# Altium PCB AOP6432.PcbDoc (part 1 of 3)
Units mm, origin at the board's own origin, x right, y up, seen from the top; angles counter-clockwise.
Board outline 64.05 x 39.02 mm, 4 copper layers (Top Layer, Layer 1, Layer 2, Bottom Layer), stack 1.52 mm thick; 112 components, 77 nets, 423 pads, 19 vias.
Unrouted connection lines stored in the file: 2.
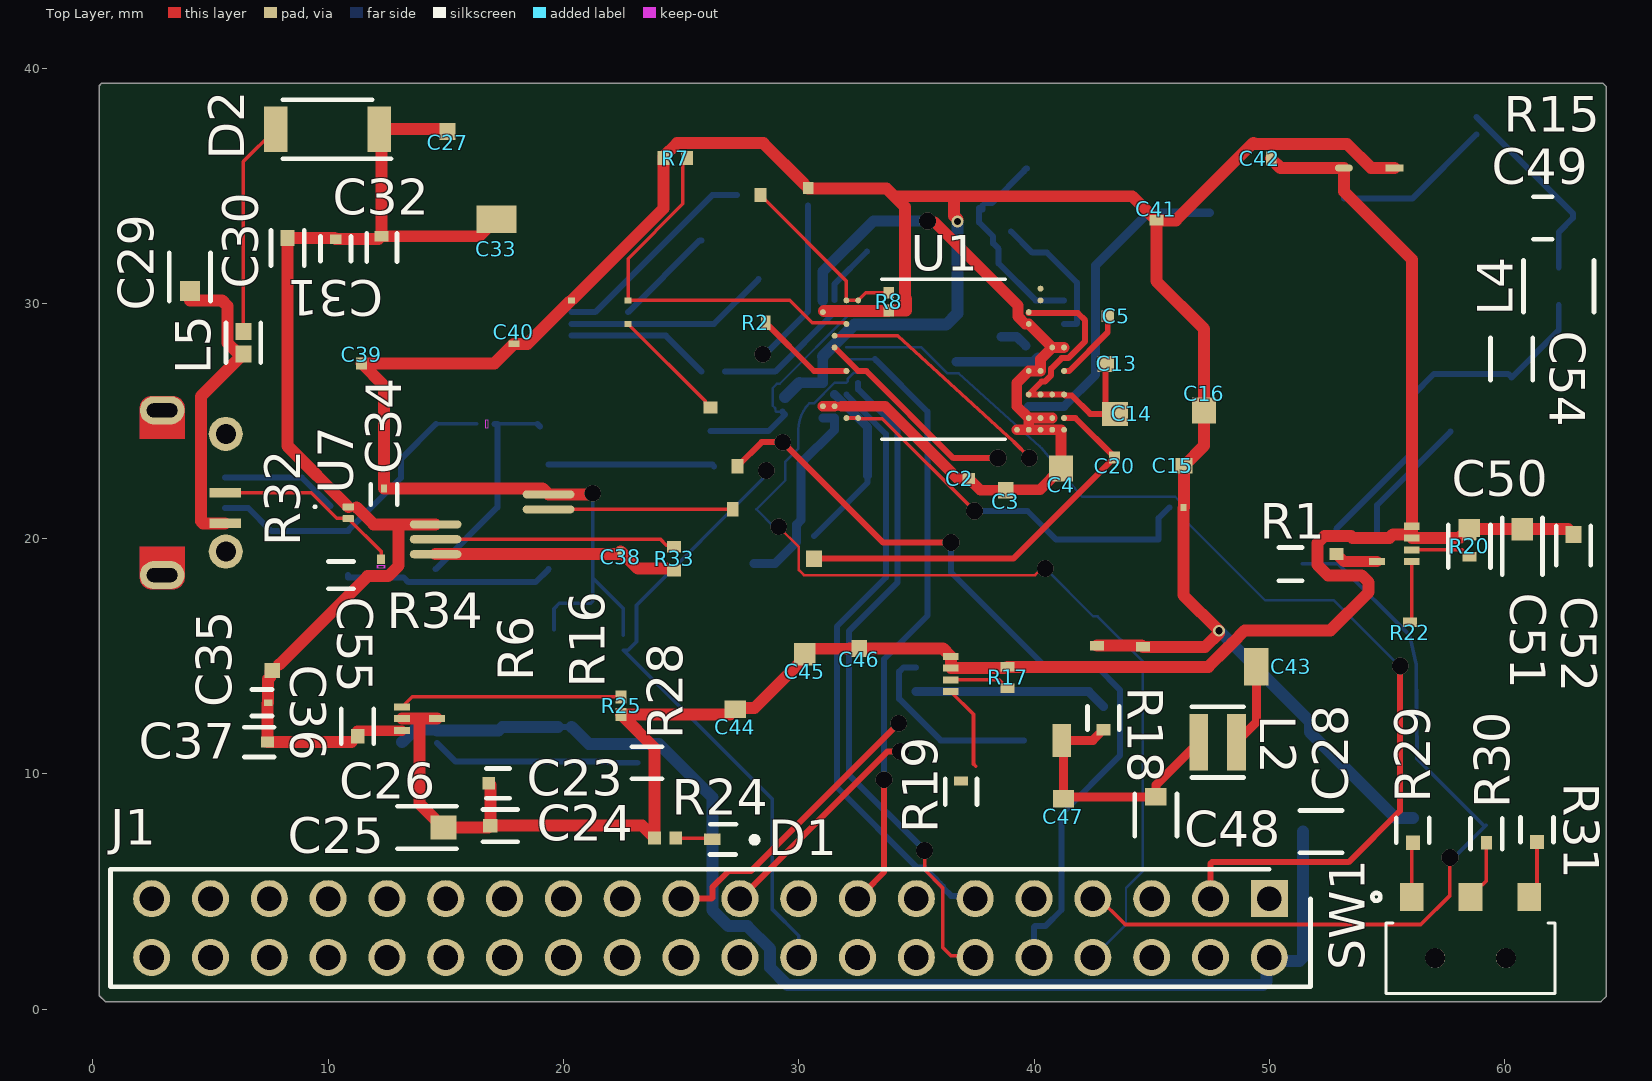
[diagram p0: Top Layer view]
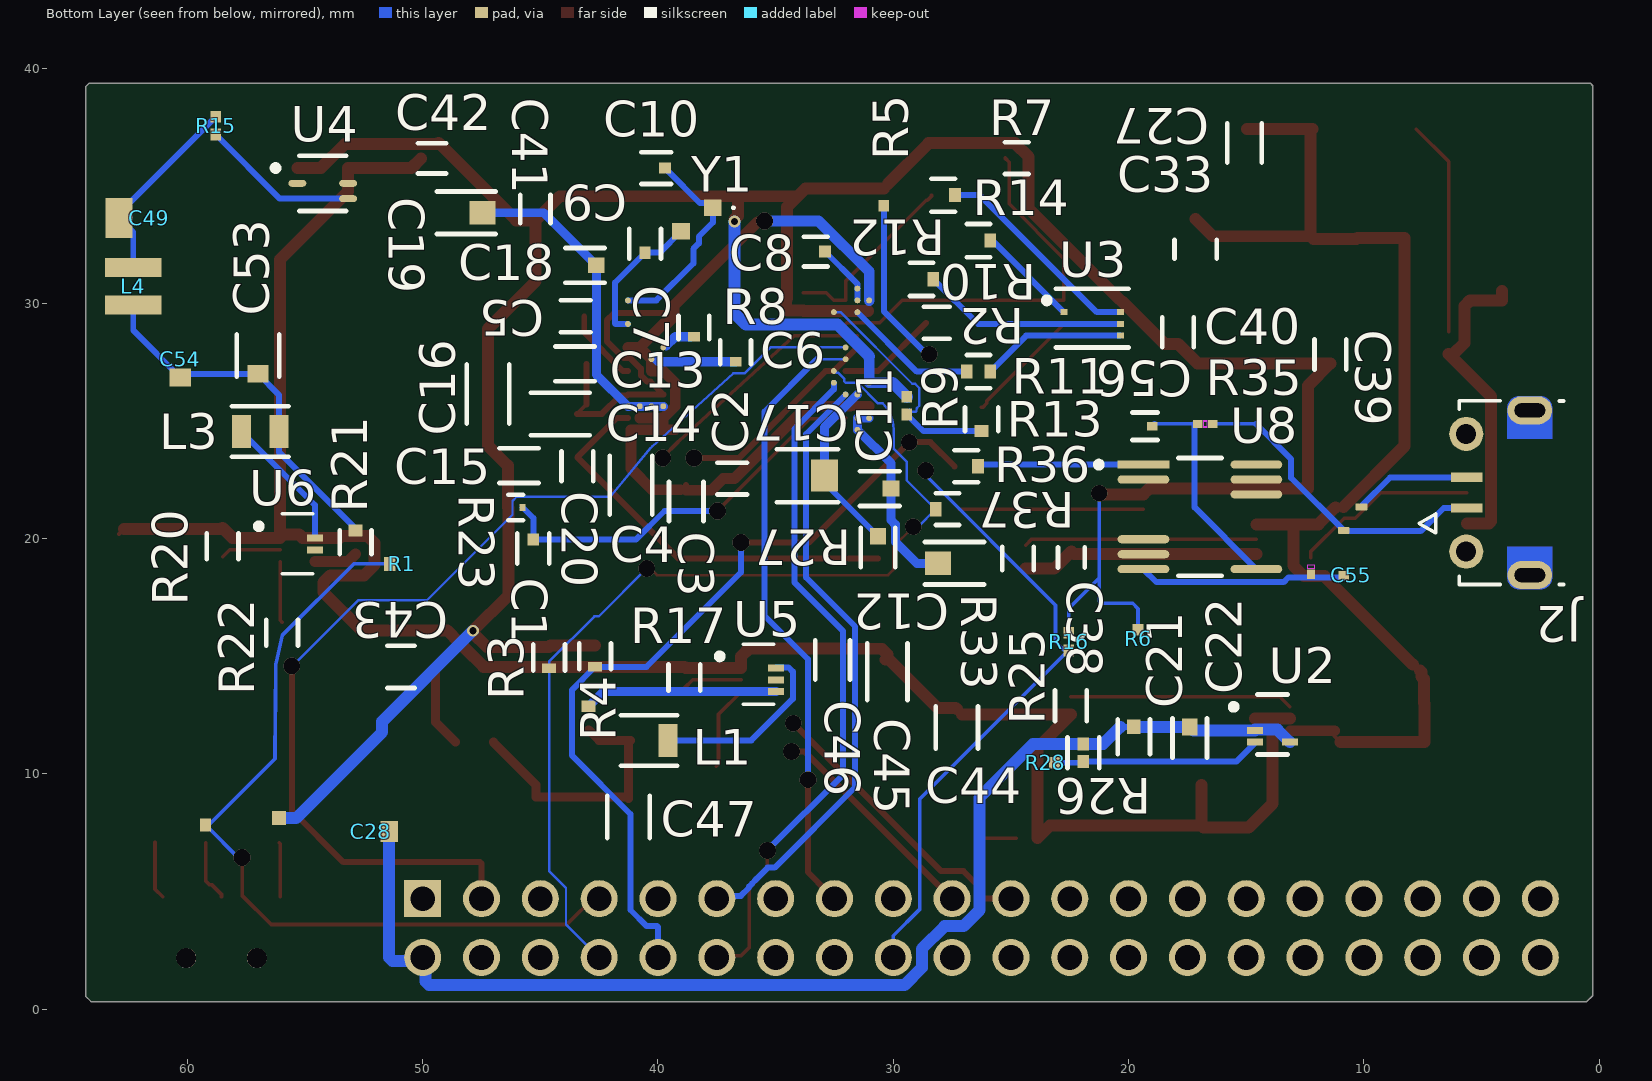
[diagram p1: Bottom Layer view, seen from below]
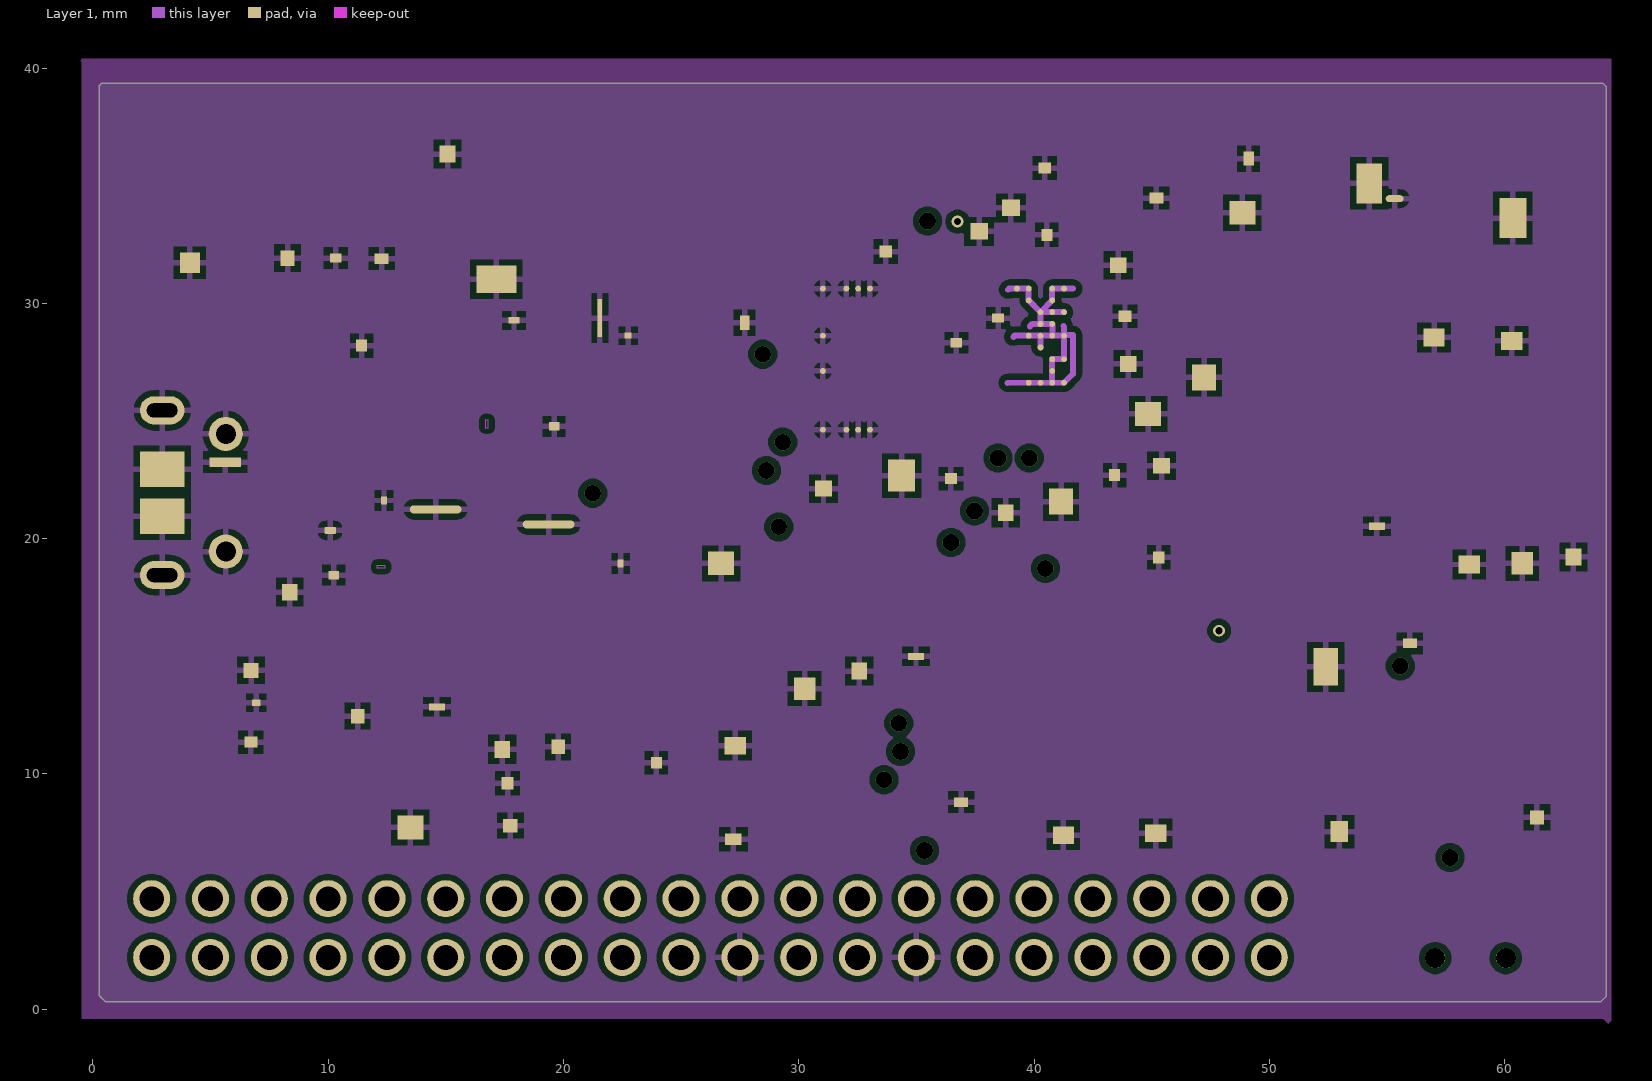
[diagram p2: Layer 1]
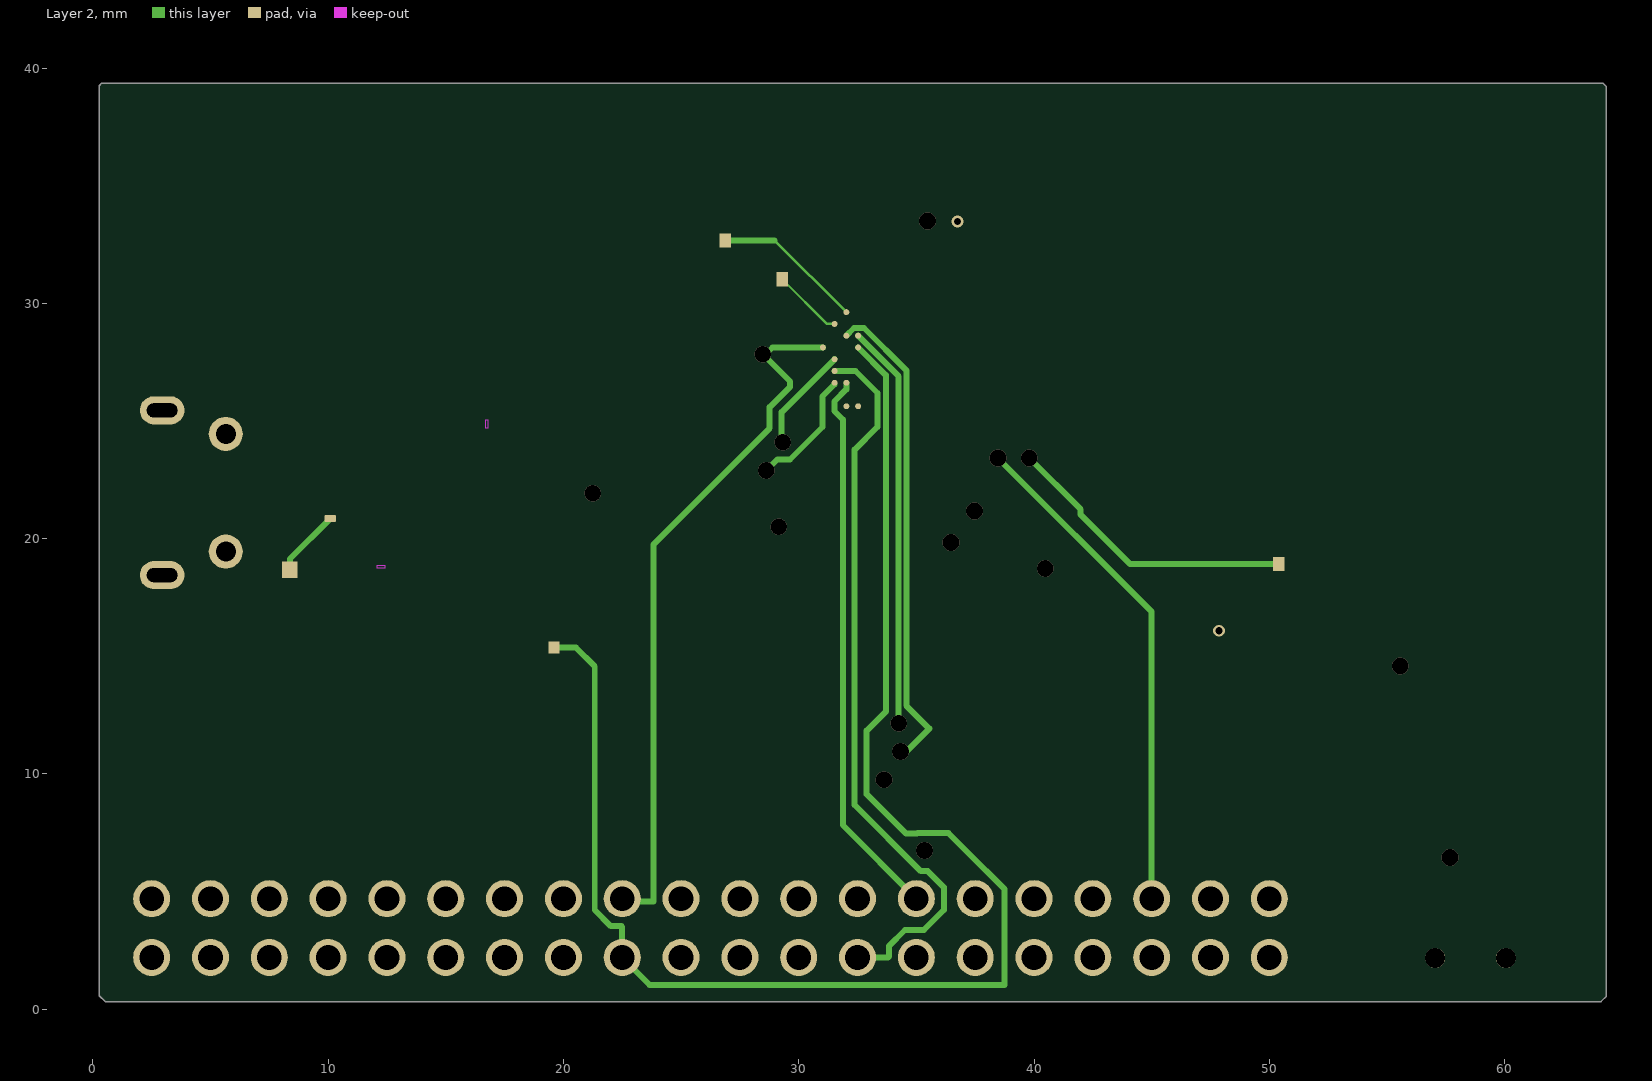
[diagram p3: Layer 2]
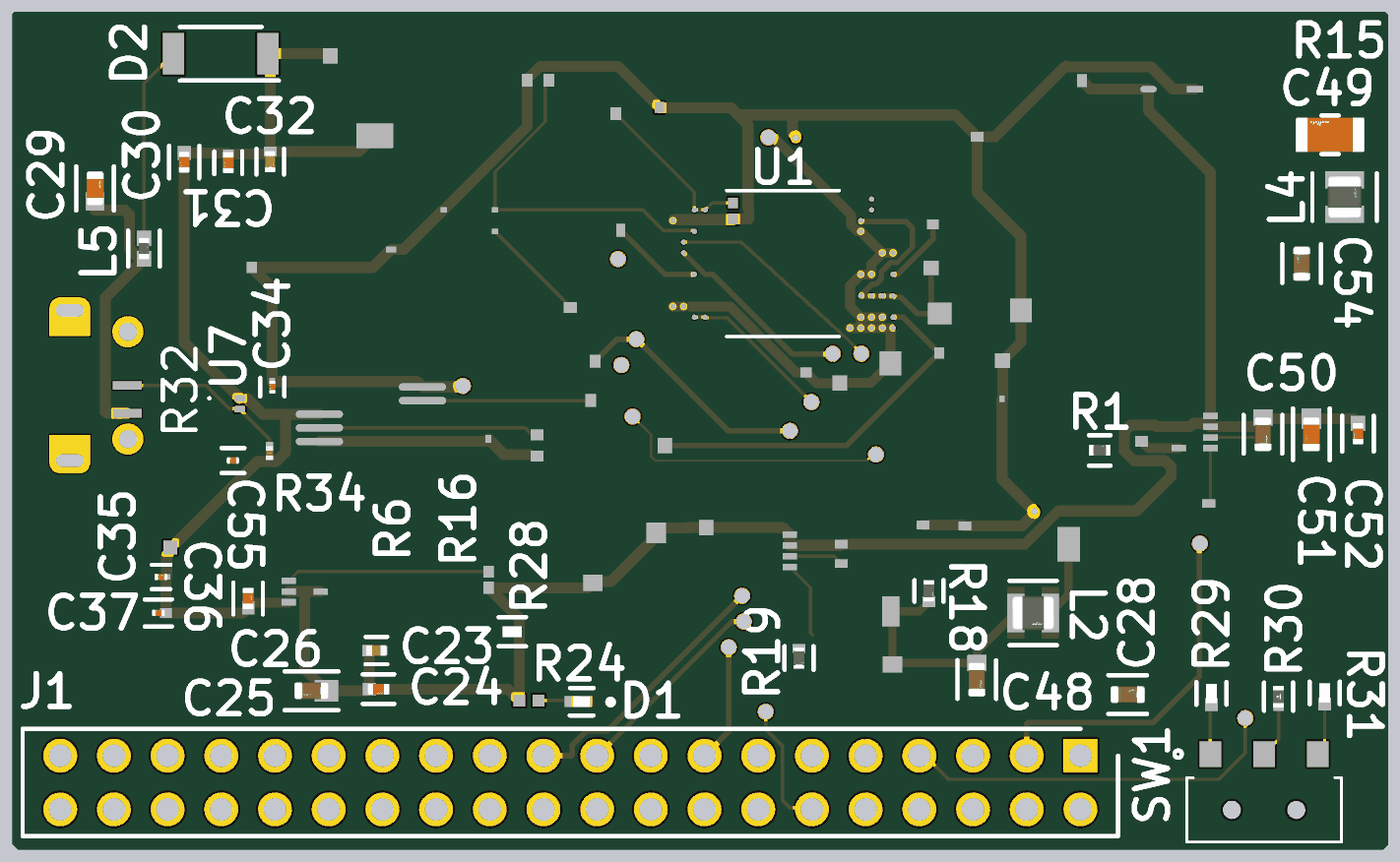
[diagram p5: 3D render of the assembled board from above, using the file's embedded part models]
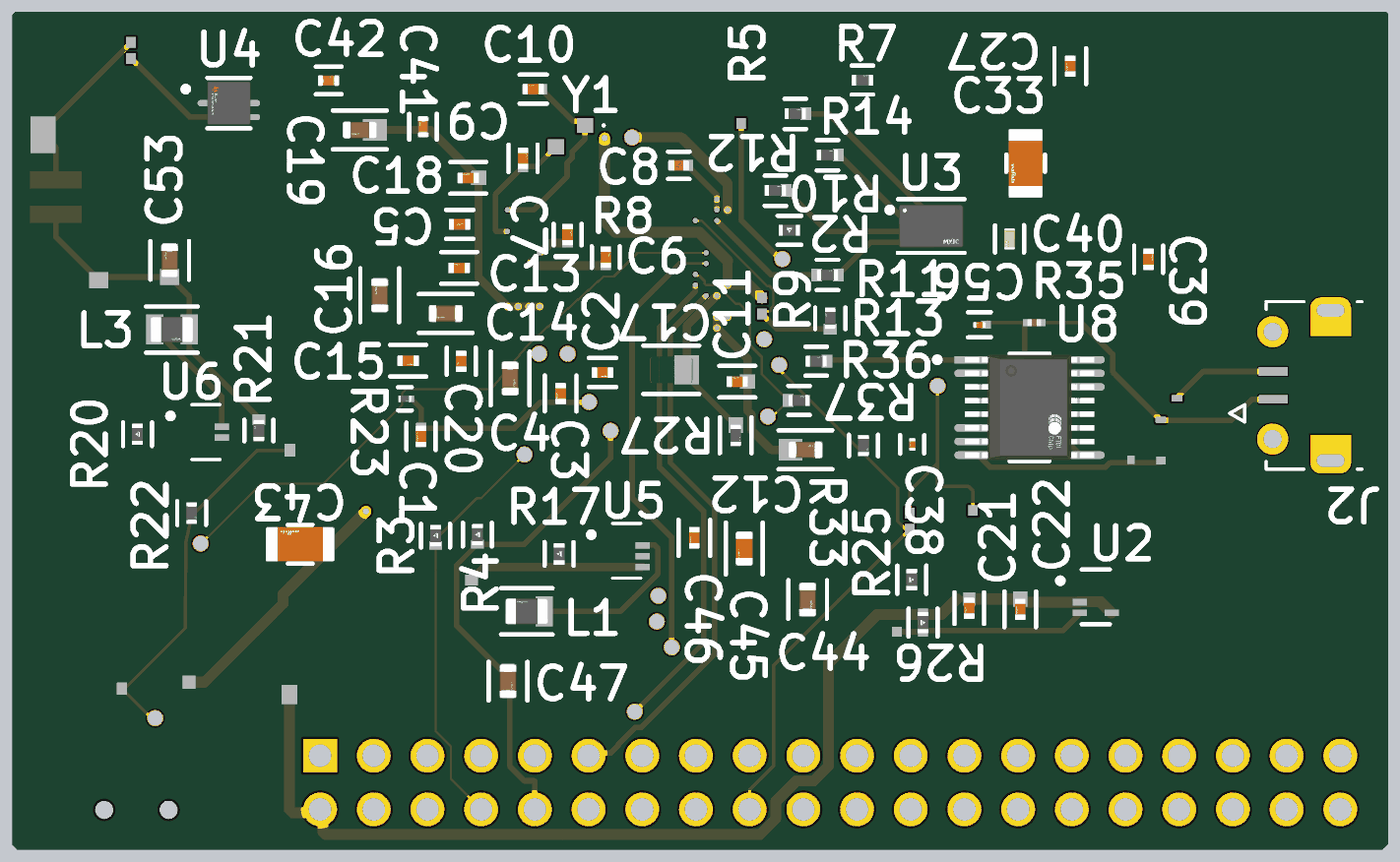
[diagram p6: 3D render of the assembled board from below, using the file's embedded part models]

## Layer stack, top to bottom
Top Solder: solder mask 0.0254, Solder Resist, Dk 3.5
Top Layer: signal copper 0.047
Dielectric 2: prepreg 0.1176, PP-006, Dk 4.1
Layer 1: signal copper 0.067
Dielectric 1: dielectric 1.0566, FR-4, Dk 4.8
Layer 2: signal copper 0.067
Dielectric 3: prepreg 0.1176, PP-006, Dk 4.1
Bottom Layer: signal copper 0.047
Bottom Solder: solder mask 0.0254, Solder Resist, Dk 3.5

## Board outline
0.275,0.575 0.275,39.25 0.375,39.35 64.175,39.35 64.325,39.2 64.325,0.55 64.1,0.325 0.525,0.325

## Design rules (kind name [scope] priority, off if disabled: settings)
Clearance [All] p1: gap=0.254 ignorepadtopadclearanceinfootprint=FALSE
PolygonConnect [All] p1: connectstyle=Relief reliefconductorwidth=0.254 reliefentries=4 polygonreliefangle="90 Angle" airgapwidth=0.254
RoutingVias [All] p1: holewidth=0.711 width=1.27 viastyle="Through Hole" minholewidth=0.711 minwidth=1.27 maxholewidth=0.711 maxwidth=1.27
SolderMaskExpansion [All] p1: expansion=0.102 istentingtop=FALSE
SupplyNets "Schematic Supply Nets_23" [InNet('FT230_VCC')] p1: voltage=0.000
SupplyNets "Schematic Supply Nets_22" [InNet('USB_VBUS')] p2: voltage=0.000
SupplyNets "Schematic Supply Nets_21" [InNet('RADAR_1V2')] p3: voltage=0.000
SupplyNets "Schematic Supply Nets_20" [InNet('FT230_VCCIO')] p4: voltage=0.000
SupplyNets "Schematic Supply Nets_13" [InNet('GND')] p5: voltage=0.000
SupplyNets "Schematic Supply Nets_18" [InNet('5V_REG')] p6: voltage=0.000
SupplyNets "Schematic Supply Nets_17" [InNet('TP10')] p7: voltage=0.000
SupplyNets "Schematic Supply Nets_16" [InNet('RADAR_1V_RF_OUT')] p8: voltage=0.000
SupplyNets "Schematic Supply Nets_15" [InNet('RADAR_1P2_RF')] p9: voltage=0.000
SupplyNets "Schematic Supply Nets_14" [InNet('REG_OUT_1V8')] p10: voltage=0.000
SupplyNets "Schematic Supply Nets_12" [InNet('RADAR_1V4_APLL')] p11: voltage=0.000
SupplyNets "Schematic Supply Nets_11" [InNet('RADAR_SRAM_1V2')] p12: voltage=0.000
SupplyNets "Schematic Supply Nets_10" [InNet('REG_1V2')] p13: voltage=0.000
SupplyNets "Schematic Supply Nets_8" [InNet('RADAR_1V8')] p14: voltage=0.000
SupplyNets "Schematic Supply Nets_7" [InNet('RADAR_1V4_SYNTH')] p15: voltage=0.000
SupplyNets "Schematic Supply Nets_6" [InNet('5V_IN')] p16: voltage=0.000
SupplyNets "Schematic Supply Nets_5" [InNet('REG_OUT_1V2')] p17: voltage=0.000
SupplyNets "Schematic Supply Nets_3" [InNet('REG_1V8')] p18: voltage=0.000
SupplyNets "Schematic Supply Nets_1" [InNet('RADAR_VBGAP')] p19: voltage=0.000
Width [All] p1: maxlimit=2.54 minlimit=0.102 preferedwidth=0.254 toplayer_maxwidth=0.508 toplayer_prefwidth=0.152 midlayer1_minwidth=0.102 midlayer1_prefwidth=0.152 midlayer2_minwidth=0.102 midlayer2_prefwidth=0.152 bottomlayer_maxwidth=0.508 minimp=50.000000 maximp=50.000000 favimp=50.000000
30 further rules are at their usual default settings.

## Classes and differential pairs
component class IO: C28 J1
component class IWRL6432AOP: C1 C8 C9 C10 C20 R1 R2 R3 R4 R5 R6 R16 R23 R27 U1 Y1
component class AOPIO: C29 C30 C31 C32 C33 C34 C35 C36 C37 C38 C55 C56 D2 J2 L5 R29 R30 R31 R32 R33 R34 R35 R36 R37 SW1 U7 U8
component class DC_Regulator: C21 C22 C23 C24 C25 C26 C27 C41 C42 C43 C44 C45 C46 C47 C48 C49 C50 C51 C52 C53 C54 D1 L1 L2 L3 L4 R15 R17 R18 R19 R20 R21 R22 R24 R25 R26 R28 U2 U4 U5 U6
component class AOP_Decoupling: C2 C3 C4 C5 C6 C7 C11 C12 C13 C14 C15 C16 C17 C18 C19 C39 C40 R7 R8 R9 R10 R11 R12 R13 R14 U3

## Components (designator, comment, footprint, x,y, rotation, side; value= is the part's Value field where it differs from the comment)
C1 "CL05B224KO5NNNC" FP-CL549-IPC_C 45.3,19.579 r270 bottom
C2 "GRM155R71C224KA12D" FP-GRM155-0_05-IPC_C 36.85,22.55 r180 bottom
C3 "GRM155R61A225ME01D" FP-GRM155-0_05-IPC_A#1 38.8,21.575 r270 bottom
C4 "GRM188Z71A106MA73D" FP-GRM188-0_2-IPC_B#1 41.15,22.274 r270 bottom
C5 "C1005X7R1H473K050BB" FP-C1005-050-0_05-IPC_C 43.5,29.45 r0 bottom
C6 "GRM155R70J105KA12D" FP-GRM155-0_05-MFG 36.7,27.925 r90 bottom
C7 "GRM155R70J105KA12D" FP-GRM155-0_05-MFG 38.475,28.975 r90 bottom
C8 "0.1uF" FP-C0402-BB-MFG 33.3,32.2 r0 bottom value="0.10 μF"
C9 "GJM1555C1H4R7BB01D" FP-GJM155-0_05-IPC_C 40.55,32.529 r90 bottom
C10 "GJM1555C1H4R7BB01D" FP-GJM155-0_05-IPC_C 40.075,35.75 r0 bottom
C11 "GRM155R61A225ME01D" FP-GRM155-0_05-IPC_A#2 30.575,22.125 r0 bottom
C12 "GRM188Z71A106MA73D" FP-GRM188-0_2-IPC_B#2 27.4,18.95 r180 bottom
C13 "GRM155R61A225ME01D" FP-GRM155-0_05-IPC_A#1 43.525,27.425 r0 bottom
C14 "GRM188Z71A106MA73D" FP-GRM188-0_2-IPC_B#1 44.15,25.3 r0 bottom
C15 "GRM155R61A225ME01D" FP-GRM155-0_05-IPC_A#1 45.9,23.1 r180 bottom
C16 "GRM188Z71A106MA73D" FP-GRM188-0_2-IPC_B#1 47.225,26.15 r90 bottom
C17 "GCJ21BR71C475KA01L" FP-GCJ21B-0_3-IPC_C 33.65,22.675 r0 bottom
C18 "GRM155R61A225ME01D" FP-GRM155-0_05-IPC_A#2 43.1,31.615 r0 bottom
C19 "GRM188Z71A106MA73D" FP-GRM188-0_2-IPC_B#2 48.15,33.85 r0 bottom
C20 "GRM155C80J105KA12D" FP-GRM155-0_05-IPC_C 43.425,23.075 r270 bottom
C21 "GRT155C81A105KE01D" FP-GRT155-0_05-IPC_B 19.775,11.575 r270 bottom
C22 "GCM155R71H104KE02D" FP-GCM155-0_05-IPC_A#1 17.4,11.521 r270 bottom
C23 "0.1uF" FP-C0402-BB-MFG 17.225,9.6 r0 top value="0.10 μF"
C24 "GRT155C81A105KE01D" FP-GRT155-0_05-IPC_B 17.321,7.8 r0 top
C25 "GRM188Z71A106MA73D" FP-GRM188-0_2-IPC_B#2 14.199,7.725 r180 top value=10uF
C26 "GRT155C81A105KE01D" FP-GRT155-0_05-IPC_B 11.25,12.025 r90 top
C27 "GCM155R71H104KE02D" FP-GCM155-0_05-IPC_A#2 15.075,36.821 r270 bottom
C28 "GRM188C81A106MA73D" FP-GRM188-0_2-MFG#1 52.2,7.55 r0 top
C29 "GRT188R61A106KE13D" FP-GRT188-0_15-IPC_C 4.125,31.125 r90 top
C30 "GCM155C71A474ME36J" FP-GCM155-0_1-IPC_B 8.275,32.35 r270 top
C31 "GCM155R71C224KE02D" FP-GCM155-0_05-MFG 10.325,32.325 r270 top
C32 "GRM155R61A106ME18D" FP-GRM155-0_2-MFG#1 12.275,32.375 r270 top
C33 "GRM31CR61A476ME15L" FP-GRM31C-0_2-e0_3_0_8-IPC_C 17.15,32.3 r270 bottom
C34 "GRM033R61C104ME14D" FP-GRM033-0_03-IPC_C#1 12.375,21.875 r270 top
C35 "0402ZD106MAT2A" CAPC1005X56N 7.175,14.4 r0 top
C36 "GRM033R61C104ME14D" FP-GRM033-0_03-IPC_C#1 7.2,13.025 r180 top
C37 "GRM033R70J103KA01D" FP-GRM033-0_03-IPC_A 7.071,11.35 r180 top
C38 "GRM033R61C104ME14D" FP-GRM033-0_03-IPC_C#2 22.432,19.2 r270 bottom
C39 "GRM155C80J105KA12D" FP-GRM155-0_05-IPC_C 11.425,27.825 r90 bottom
C40 "C1005X7R1H104K050BE" FP-C1005-050-IPC_C 17.9,28.775 r90 bottom
C41 "GRM155C81C225KE11D" FP-GRM155-0_2-MFG#2 45.2,34 r90 bottom
C42 "GRM155C81C225KE11D" FP-GRM155-0_2-MFG#2 49.6,36.15 r180 bottom
C43 "GRM31CR70J226ME19K" FP-GRM31C-0_2-e0_3_0_8-MFG 50.925,14.55 r0 bottom
C44 "GRM188C81A106MA73D" FP-GRM188-0_2-MFG#1 27.3,11.975 r270 bottom
C45 "GRM188R71C474KA88D" FP-GRM188-0_1-e0_2_0_5-IPC_B#1 30.25,14.352 r270 bottom
C46 "GRM1555C1H471JA01D" FP-GRM155-0_05-IPC_A#1 32.575,14.85 r270 bottom
C47 "GRM188C81A106MA73D" FP-GRM188-0_2-MFG#1 41.25,8.175 r270 bottom
C48 "GRM188C81A106MA73D" FP-GRM188-0_2-MFG#2 45.175,8.25 r270 top
C49 "GRM31CR60J476ME19L" FP-GRM31C-0_2-e0_3_0_8-IPC_C 61.625,33.625 r180 top
C50 "GRM188C81A106MA73D" FP-GRM188-0_2-MFG#2 58.5,19.675 r270 top
C51 "GRM188R71C474KA88D" FP-GRM188-0_1-e0_2_0_5-IPC_B#2 60.75,19.675 r270 top
C52 "GRM1555C1H471JA01D" FP-GRM155-0_05-IPC_A#2 62.925,19.7 r270 top
C53 "GRM188C81A106MA73D" FP-GRM188-0_2-MFG#2 57,27.775 r90 bottom
C54 "GRM188C81A106MA73D" FP-GRM188-0_2-MFG#1 60.3,27.625 r90 top
C55 "GCM0335C1E220JA16D" FP-GCM033-0_03-IPC_B#1 10.546,18.45 r180 top
C56 "GCM0335C1E220JA16D" FP-GCM033-0_03-IPC_B#2 19.3,24.775 r0 bottom
D1 "APHHS1005CGCK" FP-APHHS1005CGCK-MFG 26.775,7.225 r180 top
D2 "PMEG3020EP_115" SODFL4725X110N 9.975,37.4 r180 top
J1 "2714" 2714 2.883,1.398 r180 top
J2 "1050170001" MOLEX_1050170001 1.5,21.95 r90 bottom
L1 "470nH" FP-DFE201210U-MFG#1 40.375,11.425 r0 bottom
L2 "100nH" FP-LQM2MPZ_JH-w2_4-MFG#1 47.8,11.35 r0 top
L3 "470nH" FP-DFE201210U-MFG#2 56.9,24.55 r180 bottom
L4 "100nH" FP-LQM2MPZ_JH-w2_4-MFG#2 62.3,30.725 r90 top
L5 "BLM15PD300SZ1D" FP-BLM15-0_05-d0_7-IPC_A 6.4,28.325 r90 top
R1 "RT0402FRE0733R2L" FP-RT0402-0_35-MFG#1 50.9,18.925 r0 top
R2 "CRCW0402100KFKEDC" FP-CRCW0402-C-e3-MFG#1 28.15,29.175 r180 bottom
R3 "CRCW0402100KFKEDC" FP-CRCW0402-C-e3-MFG#2 44.625,14.95 r270 bottom
R4 "CRCW0402100KFKEDC" FP-CRCW0402-C-e3-MFG#2 42.675,15 r270 bottom
R5 "10k" RESC1005X40X25LL05T10#1 30.4,34.525 r270 bottom
R6 "10k" RESC1005X40X25LL05T10#2 19.6,15.75 r270 top
R7 "RC0402FR-1047K5L" FP-RC0402-0_4-MFG#1 24.75,36.175 r180 bottom
R8 "10k" RESC1005X40X25LL05T10#3 33.825,30.075 r270 bottom
R9 "10k" RESC1005X40X25LL05T10#4 29.425,25.65 r90 bottom
R10 "RT0402FRE0733R2L" FP-RT0402-0_35-MFG#2 28.8,31.025 r180 bottom
R11 "RT0402FRE0733R2L" FP-RT0402-0_35-MFG#3 26.375,27.1 r180 bottom
R12 "RT0402FRE0733R2L" FP-RT0402-0_35-MFG#2 26.375,32.675 r180 bottom
R13 "RT0402FRE0733R2L" FP-RT0402-0_35-MFG#4 26.25,25.075 r90 bottom
R14 "RT0402FRE0733R2L" FP-RT0402-0_35-MFG#5 27.875,34.6 r180 bottom
R15 "10k" RESC1005X40X25LL05T10#3 58.8,37.55 r270 top
R16 "10k" RESC1005X40X25LL05T10#3 22.55,15.625 r270 top
R17 "CRCW0402100KFKEDC" FP-CRCW0402-C-e3-MFG#3 38.875,14.1 r270 bottom
R18 "RC0402JR-070RP" FP-RC0402-0_4-MFG#2 42.95,12.375 r270 top
R19 "CRCW040218K0FKEDC" FP-CRCW0402-e3-MFG#1 36.9,9.25 r270 top
R20 "CRCW0402100KFKEDC" FP-CRCW0402-C-e3-MFG#3 58.5,19.675 r270 bottom
R21 "RC0402JR-070RP" FP-RC0402-0_4-MFG#2 52.85,19.85 r90 bottom
R22 "CRCW040218K0FKEDC" FP-CRCW0402-e3-MFG#2 55.975,16 r270 bottom
R23 "ERJ-1RHD1002C" FP-ERJ1R-MFG 46.05,21.325 r0 bottom
R24 "ERJ-2GEJ511X" RESC1005X40X25NL05T05 24.325,7.275 r180 top value=510
R25 "CRCW040210K0FKEDC" FP-CRCW0402-C-e3-IPC_C#1 22.45,12.9 r90 bottom
R26 "CRCW040210K0FKEDC" FP-CRCW0402-C-e3-IPC_C#2 21.925,10.9 r90 bottom
R27 "RC0402FR-071KL" FP-RC0402-0_4-IPC_A 30.65,19.625 r270 bottom
R28 "CRCW0402100KFKED" FP-CRCW0402-e3-IPC_C 23.55,10.475 r180 top
R29 "CRCW04027K87FKED" FP-CRCW0402-e3-MFG#3 56.1,7.6 r90 top
R30 "CRCW040210K0FKEDC" FP-CRCW0402-C-e3-IPC_C#3 59.225,7.451 r270 top
R31 "CRCW040282K5FKED" FP-CRCW0402-e3-MFG#4 61.375,7.625 r270 top
R32 "CRCW040210K0FKEDHP" RESC1005X40X25ML05T10 8.375,18.2 r90 top
R33 "RC0402JR-070RP" FP-RC0402-0_4-MFG#1 24.7,19.15 r270 bottom
R34 "RC0201JR-0727RL" RES_RC0201_P6XP3_YAG#1 12.25,18.8 r270 top
R35 "RC0201JR-0727RL" RES_RC0201_P6XP3_YAG#2 16.75,24.875 r0 bottom
R36 "RC0402JR-070RP" FP-RC0402-0_4-MFG#2 26.9,23.075 r180 bottom
R37 "RC0402JR-070RP" FP-RC0402-0_4-MFG#3 27.7,21.25 r180 bottom
SW1 "AYZ0102AGRLC" SW_AYZ0102AGRLC 58.55,2.325 r0 top
U1 "XI6432BRQAAMY" AMY0101A-MFG 36.152,27.625 r0 top
U2 "PTPS2116DRLR" DRL0008A-MFG 13.885,12.1 r180 bottom
U3 "MX25R1635FZUIH0" FP-USON-8-2x3mm-MFG 21.55,29.375 r180 bottom
U4 "TLV75533PDRVR" FP-DRV0006A-IPC_A 54.247,35.1 r180 bottom
U5 "TPS6285020ADRLR" TPS6285020ADRLR 35.725,14.5 r180 bottom
U6 "TPS6285020MDRLR" TPS6285020MDRLR 54.299,20.537 r180 bottom
U7 "TPD4E004DRYR" DRY0006A 10.475,20.85 r0 top
U8 "FT230XS-R" FP-SSOP-16-MFG 16.969,20.925 r180 bottom
Y1 "XRCGB40M000F1S2GR0" XRCGB40M000F1S2GR0 38.275,33.55 r0 bottom

## Footprints (in the part's own frame and the unit in brackets; to place one, negate y for a bottom-side part, rotate by r counter-clockwise, add the part's x,y. Pads: shape width x height; smd on the part's side, far side on the other; paste and mask are expansions set on the pad)
2714 [mm]
  rect 1.575x1.575 / inner round 1.575 / far side rect 1.575x1.575 hole 1.05: 1(-47.117,-3.302)
  round 1.575 hole 1.05: 2(-47.117,-0.802) 3(-44.617,-3.302) 4(-44.617,-0.802) 5(-42.117,-3.302) 6(-42.117,-0.802) 7(-39.617,-3.302) 8(-39.617,-0.802) 9(-37.117,-3.302) 10(-37.117,-0.802) 11(-34.617,-3.302) 12(-34.617,-0.802) 13(-32.117,-3.302) 14(-32.117,-0.802) 15(-29.617,-3.302) 16(-29.617,-0.802) 17(-27.117,-3.302) 18(-27.117,-0.802) 19(-24.617,-3.302) 20(-24.617,-0.802) 21(-22.117,-3.302) 22(-22.117,-0.802) 23(-19.617,-3.302) 24(-19.617,-0.802) 25(-17.117,-3.302) 26(-17.117,-0.802) 27(-14.617,-3.302) 28(-14.617,-0.802) 29(-12.117,-3.302) 30(-12.117,-0.802) 31(-9.617,-3.302) 32(-9.617,-0.802) 33(-7.117,-3.302) 34(-7.117,-0.802) 35(-4.617,-3.302) 36(-4.617,-0.802) 37(-2.117,-3.302) 38(-2.117,-0.802) 39(0.383,-3.302) 40(0.383,-0.802)
  silkscreen extent -48.87,-4.55 2.13,0.45
AMY0101A-MFG [mm]
  round 0.25 on Mid1 paste+0 mask+0.051: A1(-5.125,3) A3(-4.125,3) A4(-3.625,3) A5(-3.125,3) A6(3.125,3) A7(3.625,3) A9(4.625,3) A10(5.125,3) B7(3.625,2.5) B9(4.625,2.5) C8(4.125,2) C9(4.625,2) C10(5.125,2) D8(4.125,1.5) D9(4.625,1.5) E1(-5.125,1) E7(3.625,1) E8(4.125,1) E9(4.625,1) E10(5.125,1) F8(4.125,0.5) G9(4.625,0) G10(5.125,0) H1(-5.125,-0.5) H9(4.625,-0.5) J7(3.625,-1) J8(4.125,-1) J9(4.625,-1) J10(5.125,-1) N1(-5.125,-3) N3(-4.125,-3) N4(-3.625,-3) N5(-3.125,-3)
  round 0.25 smd far side paste+0 mask+0.051: A2(-4.625,3) B1(-5.125,2.5) B2(-4.625,2.5) B10(5.125,2.5) C2(-4.625,2) C4(-3.625,2) D10(5.125,1.5) F3(-4.125,0.5) F7(3.625,0.5) G3(-4.125,0) G8(4.125,0) H4(-3.625,-0.5) J1(-5.125,-1) J4(-3.625,-1) K2(-4.625,-1.5) K3(-4.125,-1.5) L7(3.625,-2) L8(4.125,-2) L9(4.625,-2) L10(5.125,-2) M1(-5.125,-2.5) M2(-4.625,-2.5) N2(-4.625,-3)
  round 0.25 smd paste+0 mask+0.051: A8(4.125,3) B3(-4.125,2.5) B4(-3.625,2.5) B8(4.125,2.5) C1(-5.125,2) C7(3.625,2) D3(-4.125,1.5) D7(3.625,1.5) E2(-4.625,1) F2(-4.625,0.5) F9(4.625,0.5) F10(5.125,0.5) H3(-4.125,-0.5) H7(3.625,-0.5) H8(4.125,-0.5) H10(5.125,-0.5) K7(3.625,-1.5) K8(4.125,-1.5) K9(4.625,-1.5) K10(5.125,-1.5) L1(-5.125,-2) L2(-4.625,-2) M3(-4.125,-2.5) M4(-3.625,-2.5) M7(3.625,-2.5) M8(4.125,-2.5) M9(4.625,-2.5) M10(5.125,-2.5) N6(3.125,-3) N7(3.625,-3) N8(4.125,-3) N9(4.625,-3) N10(5.125,-3)
  round 0.25 on Mid2 paste+0 mask+0.051: C3(-4.125,2) D2(-4.625,1.5) E3(-4.125,1) E4(-3.625,1) F1(-5.125,0.5) F4(-3.625,0.5) G2(-4.625,0) H2(-4.625,-0.5) J2(-4.625,-1) J3(-4.125,-1) L3(-4.125,-2) L4(-3.625,-2)
  silkscreen extent -2.63,-3.4 2.63,3.4
CAPC1005X56N [mm]
  rect 0.65x0.64 on Mid1: 1(-0.45,0)
  rect 0.65x0.64 smd: 2(0.45,0)
DRL0008A-MFG [mm]
  rect 0.67x0.3 on Mid1 paste+0 mask+0: 1(-0.74,0.75)
  rect 0.67x0.3 smd far side paste+0 mask+0: 2(-0.74,0.25) 6(0.74,-0.25) 7(0.74,0.25) 8(0.74,0.75)
  rect 0.67x0.3 smd paste+0 mask+0: 3(-0.74,-0.25) 4(-0.74,-0.75) 5(0.74,-0.75)
  silkscreen extent -1.78,-1.28 0.65,1.27
DRY0006A [mm] "SON, 6-Leads, Body 1.45x1mm, Pitch 0.5mm"
  rrect33% 0.52x0.3 smd far side: 1(-0.37,0.5)
  rrect33% 0.49x0.3 on Mid2: 2(-0.385,0)
  rrect33% 0.49x0.3 on Mid1: 3(-0.385,-0.5)
  rrect33% 0.49x0.3 smd far side: 4(0.385,-0.5)
  rrect33% 0.49x0.3 smd: 5(0.385,0) 6(0.385,0.5)
  silkscreen extent -1.08,0.45 -0.98,0.55, body extent -0.5,-0.72 0.5,0.72, height 0.6
FP-APHHS1005CGCK-MFG [mm]
  rect 0.7x0.5 on Mid1 paste+0 mask+0: 1(-0.45,0)
  rect 0.7x0.5 smd paste+0 mask+0: 2(0.45,0)
  silkscreen extent -1.48,-0.63 0.55,0.65, body extent -0.9,-0.4 0.9,0.4, height 0.25
FP-BLM15-0_05-d0_7-IPC_A [mm]
  rect 0.715x0.672 smd paste+0 mask+0: 1(-0.479,0) 2(0.479,0)
  silkscreen extent -0.84,-0.74 0.84,0.74, body extent -1.04,-0.54 1.04,0.54, height 0.25
FP-C0402-BB-MFG [mm]
  rect 0.52x0.52 smd paste+0 mask+0: 1(-0.4,0)
  rect 0.52x0.52 on Mid1 paste+0 mask+0: 2(0.4,0)
  silkscreen extent -0.5,-0.64 0.5,0.63, body extent -0.5,-0.25 0.5,0.25, height 0.55
FP-C1005-050-0_05-IPC_C [mm]
  rect 0.539x0.472 smd far side paste+0 mask+0: 1(-0.367,0)
  rect 0.539x0.472 on Mid1 paste+0 mask+0: 2(0.367,0)
  silkscreen extent -0.64,-0.67 0.64,0.67, body extent -0.5,-0.25 0.5,0.25, height 0.55
FP-C1005-050-IPC_C [mm]
  rect 0.272x0.472 smd far side paste+0 mask+0: 1(-0.5,0)
  rect 0.272x0.472 on Mid1 paste+0 mask+0: 2(0.5,0)
  silkscreen extent -0.64,-0.67 0.64,0.67, body extent -0.5,-0.25 0.5,0.25, height 0.55
FP-CL549-IPC_C [mm]
  rect 0.515x0.472 smd paste+0 mask+0: 1(-0.379,0)
  rect 0.515x0.472 on Mid1 paste+0 mask+0: 2(0.379,0)
  silkscreen extent -0.64,-0.67 0.64,0.67, body extent -0.5,-0.25 0.5,0.25, height 0.55
FP-CRCW0402-C-e3-IPC_C#1 [mm]
  rect 0.56x0.472 smd far side paste+0 mask+0: 1(-0.376,0) 2(0.376,0)
  silkscreen extent -0.66,-0.67 0.66,0.67, body extent -0.5,-0.25 0.5,0.25, height 0.35
FP-CRCW0402-C-e3-IPC_C#2 [mm]
  rect 0.56x0.472 smd paste+0 mask+0: 1(-0.376,0) 2(0.376,0)
  silkscreen extent -0.66,-0.67 0.66,0.67, body extent -0.5,-0.25 0.5,0.25, height 0.35
FP-CRCW0402-C-e3-IPC_C#3 [mm]
  rect 0.56x0.472 smd far side paste+0 mask+0: 1(-0.376,0)
  rect 0.56x0.472 smd paste+0 mask+0: 2(0.376,0)
  silkscreen extent -0.66,-0.67 0.66,0.67, body extent -0.76,-0.38 0.76,0.38, height 0.25
FP-CRCW0402-C-e3-MFG#1 [mm]
  rect 0.4x0.6 smd far side paste+0 mask+0: 1(-0.45,0)
  rect 0.4x0.6 on Mid1 paste+0 mask+0: 2(0.45,0)
  silkscreen extent -0.55,-0.67 0.55,0.67, body extent -0.5,-0.25 0.5,0.25, height 0.35
FP-CRCW0402-C-e3-MFG#2 [mm]
  rect 0.4x0.6 smd far side paste+0 mask+0: 1(-0.45,0)
  rect 0.4x0.6 smd paste+0 mask+0: 2(0.45,0)
  silkscreen extent -0.55,-0.67 0.55,0.67, body extent -0.5,-0.25 0.5,0.25, height 0.35
FP-CRCW0402-C-e3-MFG#3 [mm]
  rect 0.4x0.6 smd far side paste+0 mask+0: 1(-0.45,0) 2(0.45,0)
  silkscreen extent -0.55,-0.68 0.55,0.67, body extent -0.5,-0.25 0.5,0.25, height 0.35
FP-CRCW0402-e3-IPC_C [mm]
  rect 0.468x0.472 on Mid1 paste+0 mask+0: 1(-0.402,0)
  rect 0.468x0.472 smd far side paste+0 mask+0: 2(0.402,0)
  silkscreen extent -0.64,-0.67 0.64,0.67, body extent -0.74,-0.38 0.74,0.38, height 0.25
FP-CRCW0402-e3-MFG#1 [mm]
  rect 0.4x0.6 smd paste+0 mask+0: 1(-0.45,0)
  rect 0.4x0.6 on Mid1 paste+0 mask+0: 2(0.45,0)
  silkscreen extent -0.55,-0.67 0.55,0.67, body extent -0.75,-0.4 0.75,0.4, height 0.25
FP-CRCW0402-e3-MFG#2 [mm]
  rect 0.4x0.6 smd far side paste+0 mask+0: 1(-0.45,0)
  rect 0.4x0.6 on Mid1 paste+0 mask+0: 2(0.45,0)
  silkscreen extent -0.55,-0.67 0.55,0.68, body extent -0.5,-0.25 0.5,0.25, height 0.35
FP-CRCW0402-e3-MFG#3 [mm]
  rect 0.6x0.6 smd paste+0 mask+0: 1(-0.525,0)
  rect 0.6x0.6 smd far side paste+0 mask+0: 2(0.525,0)
  silkscreen extent -0.53,-0.7 0.53,0.7, body extent -0.92,-0.4 0.92,0.4, height 0.25
FP-CRCW0402-e3-MFG#4 [mm]
  rect 0.6x0.6 on Mid1 paste+0 mask+0: 1(-0.525,0)
  rect 0.6x0.6 smd paste+0 mask+0: 2(0.525,0)
  silkscreen extent -0.53,-0.7 0.53,0.7, body extent -0.92,-0.4 0.92,0.4, height 0.25
FP-DFE201210U-MFG#1 [mm]
  rect 0.8x1.4 smd paste+0 mask+0: 1(-0.8,0)
  rect 0.8x1.4 smd far side paste+0 mask+0: 2(0.8,0)
  silkscreen extent -1.2,-1.07 1.2,1.08, body extent -1,-0.6 1,0.6, height 1
FP-DFE201210U-MFG#2 [mm]
  rect 0.8x1.4 smd paste+0 mask+0: 1(-0.8,0) 2(0.8,0)
  silkscreen extent -1.2,-1.07 1.2,1.08, body extent -1,-0.6 1,0.6, height 1
FP-DRV0006A-IPC_A [mm]
  rect 0.756x0.292 smd far side paste+0 mask+0: 1(-1.078,0.65)
  rrect100% 0.756x0.292 smd paste+0 mask+0: 2(-1.078,0) 4(1.078,-0.65) 5(1.078,0)
  rrect100% 0.756x0.292 on Mid1 paste+0 mask+0: 3(-1.078,-0.65)
  rrect100% 0.756x0.292 smd far side paste+0 mask+0: 6(1.078,0.65)
  rect 1.1x1.7 on Mid1 paste-1000 mask+0: 7(0,0)
  silkscreen extent -2.13,-1.18 1,1.18, body extent -1,-1 1,1, height 0.8
FP-ERJ1R-MFG [mm]
  rect 0.25x0.3 smd paste+0 mask+0: 1(-0.3,0)
  rect 0.25x0.3 smd far side paste+0 mask+0: 2(0.3,0)
  silkscreen extent -0.32,-0.54 0.32,0.54, body extent -0.3,-0.15 0.3,0.15, height 0.26
FP-GCJ21B-0_3-IPC_C [mm]
  rect 1.153x1.356 smd paste+0 mask+0: 1(-0.725,0)
  rect 1.153x1.356 on Mid1 paste+0 mask+0: 2(0.725,0)
  silkscreen extent -1.3,-1.12 1.3,1.12, body extent -1,-0.63 1,0.63, height 1.45
FP-GCM033-0_03-IPC_B#1 [mm]
  rect 0.454x0.363 smd far side paste+0 mask+0: 1(-0.304,0)
  rect 0.454x0.363 on Mid1 paste+0 mask+0: 2(0.304,0)
  silkscreen extent -0.53,-0.58 0.53,0.58, body extent -0.68,-0.33 0.68,0.33, height 0.25
FP-GCM033-0_03-IPC_B#2 [mm]
  rect 0.454x0.363 smd paste+0 mask+0: 1(-0.304,0)
  rect 0.454x0.363 on Mid1 paste+0 mask+0: 2(0.304,0)
  silkscreen extent -0.53,-0.58 0.53,0.58, body extent -0.3,-0.15 0.3,0.15, height 0.33
FP-GCM155-0_1-IPC_B [mm]
  rect 0.66x0.612 smd paste+0 mask+0: 1(-0.426,0)
  rect 0.66x0.612 on Mid1 paste+0 mask+0: 2(0.426,0)
  silkscreen extent -0.76,-0.71 0.76,0.71, body extent -0.91,-0.46 0.91,0.46, height 0.25
FP-GCM155-0_05-IPC_A#1 [mm]
  rect 0.715x0.672 smd paste+0 mask+0: 1(-0.479,0)
  rect 0.715x0.672 on Mid1 paste+0 mask+0: 2(0.479,0)
  silkscreen extent -0.84,-0.74 0.84,0.74, body extent -0.5,-0.25 0.5,0.25, height 0.55
FP-GCM155-0_05-IPC_A#2 [mm]
  rect 0.715x0.672 smd far side paste+0 mask+0: 1(-0.479,0)
  rect 0.715x0.672 on Mid1 paste+0 mask+0: 2(0.479,0)
  silkscreen extent -0.84,-0.74 0.84,0.74, body extent -0.5,-0.25 0.5,0.25, height 0.55
FP-GCM155-0_05-MFG [mm]
  rect 0.4x0.5 smd paste+0 mask+0: 1(-0.4,0)
  rect 0.4x0.5 on Mid1 paste+0 mask+0: 2(0.4,0)
  silkscreen extent -0.53,-0.65 0.53,0.65, body extent -0.7,-0.38 0.7,0.38, height 0.25
FP-GJM155-0_05-IPC_C [mm]
  rect 0.515x0.472 smd paste+0 mask+0: 1(-0.379,0)
  rect 0.515x0.472 on Mid1 paste+0 mask+0: 2(0.379,0)
  silkscreen extent -0.64,-0.67 0.64,0.67, body extent -0.5,-0.25 0.5,0.25, height 0.55
FP-GRM31C-0_2-e0_3_0_8-IPC_C [mm]
  rect 1.155x1.706 smd far side paste+0 mask+0: 1(-1.276,0)
  rect 1.155x1.706 on Mid1 paste+0 mask+0: 2(1.276,0)
  silkscreen extent -0.4,-0.9 0.4,0.9, body extent -1.6,-0.8 1.6,0.8, height 1.8
FP-GRM31C-0_2-e0_3_0_8-MFG [mm]
  rect 1.05x1.6 smd far side paste+0 mask+0: 1(-1.475,0)
  rect 1.05x1.6 on Mid1 paste+0 mask+0: 2(1.475,0)
  silkscreen extent -0.57,-0.9 0.57,0.9, body extent -1.6,-0.8 1.6,0.8, height 1.8
FP-GRM033-0_03-IPC_A [mm]
  rect 0.554x0.463 smd paste+0 mask+0: 1(-0.354,0)
  rect 0.554x0.463 on Mid1 paste+0 mask+0: 2(0.354,0)
  silkscreen extent -0.63,-0.63 0.63,0.63, body extent -0.83,-0.43 0.83,0.43, height 0.25
FP-GRM033-0_03-IPC_C#1 [mm]
  rect 0.354x0.263 smd paste+0 mask+0: 1(-0.254,0)
  rect 0.354x0.263 on Mid1 paste+0 mask+0: 2(0.254,0)
  silkscreen extent -0.43,-0.57 0.43,0.57, body extent -0.53,-0.27 0.53,0.27, height 0.25
FP-GRM033-0_03-IPC_C#2 [mm]
  rect 0.354x0.263 smd far side paste+0 mask+0: 1(-0.254,0)
  rect 0.354x0.263 on Mid1 paste+0 mask+0: 2(0.254,0)
  silkscreen extent -0.43,-0.57 0.43,0.57, body extent -0.3,-0.15 0.3,0.15, height 0.33
FP-GRM155-0_2-MFG#1 [mm]
  rect 0.45x0.6 smd paste+0 mask+0: 1(-0.475,0)
  rect 0.45x0.6 on Mid1 paste+0 mask+0: 2(0.475,0)
  silkscreen extent -0.6,-0.64 0.6,0.65, body extent -0.5,-0.25 0.5,0.25, height 0.7
FP-GRM155-0_2-MFG#2 [mm]
  rect 0.45x0.6 smd far side paste+0 mask+0: 1(-0.475,0)
  rect 0.45x0.6 on Mid1 paste+0 mask+0: 2(0.475,0)
  silkscreen extent -0.6,-0.64 0.6,0.65, body extent -0.5,-0.25 0.5,0.25, height 0.7
FP-GRM155-0_05-IPC_A#1 [mm]
  rect 0.715x0.672 smd far side paste+0 mask+0: 1(-0.479,0)
  rect 0.715x0.672 on Mid1 paste+0 mask+0: 2(0.479,0)
  silkscreen extent -0.84,-0.74 0.84,0.74, body extent -0.5,-0.25 0.5,0.25, height 0.55
FP-GRM155-0_05-IPC_A#2 [mm]
  rect 0.715x0.672 smd paste+0 mask+0: 1(-0.479,0)
  rect 0.715x0.672 on Mid1 paste+0 mask+0: 2(0.479,0)
  silkscreen extent -0.84,-0.74 0.84,0.74, body extent -0.5,-0.25 0.5,0.25, height 0.55
FP-GRM155-0_05-IPC_C [mm]
  rect 0.515x0.472 smd far side paste+0 mask+0: 1(-0.379,0)
  rect 0.515x0.472 on Mid1 paste+0 mask+0: 2(0.379,0)
  silkscreen extent -0.64,-0.67 0.64,0.67, body extent -0.5,-0.25 0.5,0.25, height 0.55
FP-GRM155-0_05-MFG [mm]
  rect 0.4x0.5 smd paste+0 mask+0: 1(-0.4,0)
  rect 0.4x0.5 on Mid1 paste+0 mask+0: 2(0.4,0)
  silkscreen extent -0.5,-0.65 0.5,0.65, body extent -0.5,-0.25 0.5,0.25, height 0.55
FP-GRM188-0_1-e0_2_0_5-IPC_B#1 [mm]
  rect 0.959x0.912 smd far side paste+0 mask+0: 1(-0.727,0)
  rect 0.959x0.912 on Mid1 paste+0 mask+0: 2(0.727,0)
  silkscreen extent -1.21,-0.86 1.21,0.86, body extent -0.8,-0.4 0.8,0.4, height 0.9
FP-GRM188-0_1-e0_2_0_5-IPC_B#2 [mm]
  rect 0.959x0.912 smd paste+0 mask+0: 1(-0.727,0)
  rect 0.959x0.912 on Mid1 paste+0 mask+0: 2(0.727,0)
  silkscreen extent -1.21,-0.86 1.21,0.86, body extent -1.46,-0.71 1.46,0.71, height 0.25
FP-GRM188-0_2-IPC_B#1 [mm]
  rect 1.105x1.006 smd far side paste+0 mask+0: 1(-0.701,0)
  rect 1.105x1.006 on Mid1 paste+0 mask+0: 2(0.701,0)
  silkscreen extent -1.25,-0.9 1.25,0.9, body extent -0.8,-0.4 0.8,0.4, height 1
FP-GRM188-0_2-IPC_B#2 [mm]
  rect 1.105x1.006 smd paste+0 mask+0: 1(-0.701,0)
  rect 1.105x1.006 on Mid1 paste+0 mask+0: 2(0.701,0)
  silkscreen extent -1.25,-0.9 1.25,0.9, body extent -0.8,-0.4 0.8,0.4, height 1
FP-GRM188-0_2-MFG#1 [mm]
  rect 0.75x0.9 smd far side paste+0 mask+0: 1(-0.775,0)
  rect 0.75x0.9 on Mid1 paste+0 mask+0: 2(0.775,0)
  silkscreen extent -0.9,-0.9 0.9,0.9, body extent -1.25,-0.6 1.25,0.6, height 0.25
FP-GRM188-0_2-MFG#2 [mm]
  rect 0.75x0.9 smd paste+0 mask+0: 1(-0.775,0)
  rect 0.75x0.9 on Mid1 paste+0 mask+0: 2(0.775,0)
  silkscreen extent -0.9,-0.9 0.9,0.9, body extent -1.25,-0.6 1.25,0.6, height 0.25
FP-GRT155-0_05-IPC_B [mm]
  rect 0.615x0.572 smd paste+0 mask+0: 1(-0.429,0)
  rect 0.615x0.572 on Mid1 paste+0 mask+0: 2(0.429,0)
  silkscreen extent -0.74,-0.69 0.74,0.69, body extent -0.5,-0.25 0.5,0.25, height 0.55
FP-GRT188-0_15-IPC_C [mm]
  rect 0.856x0.858 smd paste+0 mask+0: 1(-0.601,0)
  rect 0.856x0.858 on Mid1 paste+0 mask+0: 2(0.601,0)
  silkscreen extent -1.03,-0.87 1.03,0.87, body extent -1.13,-0.58 1.13,0.58, height 0.25
FP-LQM2MPZ_JH-w2_4-MFG#1 [mm]
  rect 0.8x2.4 smd paste-1000 mask-1000: 1(-0.8,0) 2(0.8,0)
  silkscreen extent -1.1,-1.5 1.1,1.5, body extent -1.3,-1.3 1.3,1.3, height 0.25
FP-LQM2MPZ_JH-w2_4-MFG#2 [mm]
  rect 0.8x2.4 smd far side paste-1000 mask-1000: 1(-0.8,0) 2(0.8,0)
  silkscreen extent -1.1,-1.5 1.1,1.5, body extent -1.3,-1.3 1.3,1.3, height 0.25
FP-RC0402-0_4-IPC_A [mm]
  rect 0.715x0.672 smd paste+0 mask+0: 1(-0.479,0)
  rect 0.715x0.672 smd far side paste+0 mask+0: 2(0.479,0)
  silkscreen extent -0.84,-0.74 0.84,0.74, body extent -0.5,-0.25 0.5,0.25, height 0.4
FP-RC0402-0_4-MFG#1 [mm]
  rect 0.5x0.6 smd far side paste+0 mask+0: 1(-0.5,0) 2(0.5,0)
  silkscreen extent -0.5,-0.67 0.5,0.67, body extent -0.5,-0.25 0.5,0.25, height 0.4
FP-RC0402-0_4-MFG#2 [mm]
  rect 0.5x0.6 smd far side paste+0 mask+0: 1(-0.5,0)
  rect 0.5x0.6 smd paste+0 mask+0: 2(0.5,0)
  silkscreen extent -0.5,-0.68 0.5,0.67, body extent -0.85,-0.4 0.85,0.4, height 0.25
FP-RC0402-0_4-MFG#3 [mm]
  rect 0.5x0.6 smd paste+0 mask+0: 1(-0.5,0)
  rect 0.5x0.6 smd far side paste+0 mask+0: 2(0.5,0)
  silkscreen extent -0.5,-0.67 0.5,0.67, body extent -0.5,-0.25 0.5,0.25, height 0.4
FP-RT0402-0_35-MFG#1 [mm]
  rect 0.5x0.6 on Mid2 paste+0 mask+0: 1(-0.5,0)
  rect 0.5x0.6 smd far side paste+0 mask+0: 2(0.5,0)
  silkscreen extent -0.5,-0.71 0.5,0.7, body extent -0.85,-0.4 0.85,0.4, height 0.25
FP-RT0402-0_35-MFG#2 [mm]
  rect 0.5x0.6 on Mid2 paste+0 mask+0: 1(-0.5,0)
  rect 0.5x0.6 smd paste+0 mask+0: 2(0.5,0)
  silkscreen extent -0.5,-0.71 0.5,0.7, body extent -0.5,-0.25 0.5,0.25, height 0.35
FP-RT0402-0_35-MFG#3 [mm]
  rect 0.5x0.6 smd paste+0 mask+0: 1(-0.5,0) 2(0.5,0)
  silkscreen extent -0.5,-0.71 0.5,0.7, body extent -0.5,-0.25 0.5,0.25, height 0.35
FP-RT0402-0_35-MFG#4 [mm]
  rect 0.5x0.6 smd paste+0 mask+0: 1(-0.5,0)
  rect 0.5x0.6 smd far side paste+0 mask+0: 2(0.5,0)
  silkscreen extent -0.5,-0.71 0.5,0.7, body extent -0.5,-0.25 0.5,0.25, height 0.35
FP-RT0402-0_35-MFG#5 [mm]
  rect 0.5x0.6 smd far side paste+0 mask+0: 1(-0.5,0)
  rect 0.5x0.6 smd paste+0 mask+0: 2(0.5,0)
  silkscreen extent -0.5,-0.71 0.5,0.7, body extent -0.5,-0.25 0.5,0.25, height 0.35
FP-SSOP-16-MFG [mm]
  rect 2.2x0.345 smd paste+0 mask+0: 1(-2.4,2.223)
  rrect100% 2.2x0.345 smd paste+0 mask+0: 2(-2.4,1.588) 6(-2.4,-0.952) 7(-2.4,-1.587) 8(-2.4,-2.222) 9(2.4,-2.223) 14(2.4,0.952) 15(2.4,1.587) 16(2.4,2.222)
  rrect100% 2.2x0.345 smd far side paste+0 mask+0: 3(-2.4,0.953) 4(-2.4,0.318) 10(2.4,-1.588) 11(2.4,-0.953) 12(2.4,-0.318)
  rrect100% 2.2x0.345 on Mid1 paste+0 mask+0: 5(-2.4,-0.317) 13(2.4,0.317)
  silkscreen extent -4.42,-2.5 0.92,2.5, body extent -3.01,-2.45 3.01,2.45, height 1.75
FP-USON-8-2x3mm-MFG [mm]
  rect 0.3x0.25 smd far side paste+0 mask+0: 1(-1.2,0.75) 3(-1.2,-0.25) 8(1.2,0.75)
  rect 0.3x0.25 smd paste+0 mask+0: 2(-1.2,0.25) 5(1.2,-0.75) 6(1.2,-0.25) 7(1.2,0.25)
  rect 0.3x0.25 on Mid1 paste+0 mask+0: 4(-1.2,-0.75)
  rect 0.2x1.6 on Mid1 paste+0 mask+0: 9(0,0)
  silkscreen extent -2.05,-1.25 1.55,1.25, body extent -1.5,-1 1.5,1, height 0.6
MOLEX_1050170001 [mm]
  rect 0.4x1.35 smd far side mask+0.064: 1(-1.3,4.125) 3(0,4.125)
  rect 0.4x1.35 smd mask+0.064: 2(-0.65,4.125) 4(0.65,4.125)
  rect 0.4x1.35 on Mid1 mask+0.064: 5(1.3,4.125)
  round 1.45 hole 0.85 mask+0.064: SH1(-2.5,4.15) SH2(2.5,4.15)
  oval 1.2x1.9 hole 0.6 slot 1.3 at 90 deg mask+0: SH3(-3.5,1.45) SH6(3.5,1.45)
  rect 1.5x1.9 on Mid1 mask+0.064: SH4(-1,1.45) SH5(1,1.45)
  Top Layer region: 3.626,2.399 3.652,2.397 3.678,2.394 3.704,2.389 3.729,2.383 3.755,2.376 3.779,2.367 3.803,2.357 3.827,2.346 3.85,2.333 3.872,2.319 3.894,2.305 3.915,2.289 3.935,2.272 3.954,2.254 3.972,2.235 3.989,2.215 4.005,2.194 4.019,2.172 4.033,2.15 4.046,2.127 4.057,2.103 4.067,2.079 4.076,2.055 4.083,2.029 4.089,2.004 4.094,1.978 4.097,1.952 4.099,1.926 4.1,1.9 4.1,1 4.099,0.974 4.097,0.948 4.094,0.922 4.089,0.896 4.083,0.871 4.076,0.845 4.067,0.821 4.057,0.797 4.046,0.773 4.033,0.75 4.019,0.728 4.005,0.706 3.989,0.685 3.972,0.665 3.954,0.646 3.935,0.628 3.915,0.611 3.894,0.595 3.872,0.581 3.85,0.567 3.827,0.554 3.803,0.543 3.779,0.533 3.755,0.524 3.729,0.517 3.704,0.511 3.678,0.506 3.652,0.503 3.626,0.501 3.6,0.5 2.3,0.5 2.3,2.4 3.6,2.4
  Top Layer region: -2.3,0.5 -3.6,0.5 -3.626,0.501 -3.652,0.503 -3.678,0.506 -3.704,0.511 -3.729,0.517 -3.755,0.524 -3.779,0.533 -3.803,0.543 -3.827,0.554 -3.85,0.567 -3.872,0.581 -3.894,0.595 -3.915,0.611 -3.935,0.628 -3.954,0.646 -3.972,0.665 -3.989,0.685 -4.005,0.706 -4.019,0.728 -4.033,0.75 -4.046,0.773 -4.057,0.797 -4.067,0.821 -4.076,0.845 -4.083,0.871 -4.089,0.896 -4.094,0.922 -4.097,0.948 -4.099,0.974 -4.1,1 -4.1,1.9 -4.099,1.926 -4.097,1.952 -4.094,1.978 -4.089,2.004 -4.083,2.029 -4.076,2.055 -4.067,2.079 -4.057,2.103 -4.046,2.127 -4.033,2.15 -4.019,2.172 -4.005,2.194 -3.989,2.215 -3.972,2.235 -3.954,2.254 -3.935,2.272 -3.915,2.289 -3.894,2.305 -3.872,2.319 -3.85,2.333 -3.827,2.346 -3.803,2.357 -3.779,2.367 -3.755,2.376 -3.729,2.383 -3.704,2.389 -3.678,2.394 -3.652,2.397 -3.626,2.399 -3.6,2.4 -2.3,2.4
  Bottom Layer region: -2.3,0.5 -3.6,0.5 -3.626,0.501 -3.652,0.503 -3.678,0.506 -3.704,0.511 -3.729,0.517 -3.755,0.524 -3.779,0.533 -3.803,0.543 -3.827,0.554 -3.85,0.567 -3.872,0.581 -3.894,0.595 -3.915,0.611 -3.935,0.628 -3.954,0.646 -3.972,0.665 -3.989,0.685 -4.005,0.706 -4.019,0.728 -4.033,0.75 -4.046,0.773 -4.057,0.797 -4.067,0.821 -4.076,0.845 -4.083,0.871 -4.089,0.896 -4.094,0.922 -4.097,0.948 -4.099,0.974 -4.1,1 -4.1,1.9 -4.099,1.926 -4.097,1.952 -4.094,1.978 -4.089,2.004 -4.083,2.029 -4.076,2.055 -4.067,2.079 -4.057,2.103 -4.046,2.127 -4.033,2.15 -4.019,2.172 -4.005,2.194 -3.989,2.215 -3.972,2.235 -3.954,2.254 -3.935,2.272 -3.915,2.289 -3.894,2.305 -3.872,2.319 -3.85,2.333 -3.827,2.346 -3.803,2.357 -3.779,2.367 -3.755,2.376 -3.729,2.383 -3.704,2.389 -3.678,2.394 -3.652,2.397 -3.626,2.399 -3.6,2.4 -2.3,2.4
  Bottom Layer region: 3.626,2.399 3.652,2.397 3.678,2.394 3.704,2.389 3.729,2.383 3.755,2.376 3.779,2.367 3.803,2.357 3.827,2.346 3.85,2.333 3.872,2.319 3.894,2.305 3.915,2.289 3.935,2.272 3.954,2.254 3.972,2.235 3.989,2.215 4.005,2.194 4.019,2.172 4.033,2.15 4.046,2.127 4.057,2.103 4.067,2.079 4.076,2.055 4.083,2.029 4.089,2.004 4.094,1.978 4.097,1.952 4.099,1.926 4.1,1.9 4.1,1 4.099,0.974 4.097,0.948 4.094,0.922 4.089,0.896 4.083,0.871 4.076,0.845 4.067,0.821 4.057,0.797 4.046,0.773 4.033,0.75 4.019,0.728 4.005,0.706 3.989,0.685 3.972,0.665 3.954,0.646 3.935,0.628 3.915,0.611 3.894,0.595 3.872,0.581 3.85,0.567 3.827,0.554 3.803,0.543 3.779,0.533 3.755,0.524 3.729,0.517 3.704,0.511 3.678,0.506 3.652,0.503 3.626,0.501 3.6,0.5 2.3,0.5 2.3,2.4 3.6,2.4
  silkscreen extent -3.9,0 3.9,6.15
RES_RC0201_P6XP3_YAG#1 [mil]
  rect 16x13 smd paste+0 mask+0: 1(-12.5,0)
  rect 16x13 smd far side paste+0 mask+0: 2(12.5,0)
  Top Layer keep-out region: -2.5,-4.5 -2.5,4.5 2.5,4.5 2.5,-4.5
  Keep-Out Layer region: -2.5,-6.5 -2.5,6.5 2.5,6.5 2.5,-6.5
  body extent -13,-6 13,6, height 10
RES_RC0201_P6XP3_YAG#2 [mil]
  rect 16x13 smd paste+0 mask+0: 1(-12.5,0) 2(12.5,0)
  Top Layer keep-out region: -2.5,-4.5 -2.5,4.5 2.5,4.5 2.5,-4.5
  Keep-Out Layer region: -2.5,-6.5 -2.5,6.5 2.5,6.5 2.5,-6.5
  body extent -13,-6 13,6, height 10
RESC1005X40X25LL05T10#1 [mm] "Chip Resistor, 2-Leads, Body 1.00x0.50mm, IPC High Density"
  rect 0.5x0.45 smd far side: 1(-0.375,0)
  rect 0.5x0.45 smd: 2(0.375,0)
  body extent -0.53,-0.27 0.53,0.28, height 0.4
RESC1005X40X25LL05T10#2 [mm] "Chip Resistor, 2-Leads, Body 1.00x0.50mm, IPC High Density"
  rect 0.5x0.45 smd far side: 1(-0.375,0)
  rect 0.5x0.45 on Mid2: 2(0.375,0)
  body extent -0.53,-0.27 0.53,0.28, height 0.4
RESC1005X40X25LL05T10#3 [mm] "Chip Resistor, 2-Leads, Body 1.00x0.50mm, IPC High Density"
  rect 0.5x0.45 smd far side: 1(-0.375,0) 2(0.375,0)
  body extent -0.53,-0.27 0.53,0.28, height 0.4
RESC1005X40X25LL05T10#4 [mm] "Chip Resistor, 2-Leads, Body 1.00x0.50mm, IPC High Density"
  rect 0.5x0.45 smd: 1(-0.375,0) 2(0.375,0)
  body extent -0.53,-0.27 0.53,0.28, height 0.4
RESC1005X40X25ML05T10 [mm] "Chip Resistor, 2-Leads, Body 1.00x0.50mm, IPC Low Density"
  rect 0.7x0.65 on Mid1: 1(-0.475,0)
  rect 0.7x0.65 on Mid2: 2(0.475,0)
  body extent -0.53,-0.27 0.53,0.28, height 0.4
RESC1005X40X25NL05T05 [mm] "Chip Resistor, 2-Leads, Body 1.00x0.50mm, IPC Medium Density"
  rect 0.55x0.55 smd: 1(-0.45,0) 2(0.45,0)
  body extent -0.53,-0.27 0.53,0.28, height 0.4
SODFL4725X110N [mm]
  rect 1x1.93 smd: 1(-2.2,0) 2(2.2,0)
  silkscreen extent -2.7,-1.25 1.9,1.25
SW_AYZ0102AGRLC [mm]
  rect 1x1.2 smd: 1(-2.5,2.45) 2(0,2.45) 3(2.5,2.45)
  round 0.85 hole 0.85 unplated: ""(-1.5,-0.15) ""(1.5,-0.15)
  silkscreen extent -4.17,-1.65 3.6,2.62
TPS6285020ADRLR [mm]
  rect 0.67x0.3 smd far side paste+0 mask+0: 1(-0.74,0.496) 2(-0.74,-0.004) 3(-0.74,-0.504) 4(-0.74,-1.004)
  rect 0.67x0.3 smd paste+0 mask+0: 5(0.74,-1.004) 6(0.74,-0.504) 7(0.74,-0.004)
  rect 0.67x0.3 on Mid1 paste+0 mask+0: 8(0.74,0.496)
  silkscreen extent -1.78,-1.53 0.65,1.02
TPS6285020MDRLR [mm]
  rect 0.67x0.3 smd far side paste+0 mask+0: 1(-1.756,-0.012) 2(-1.756,-0.512) 3(-1.756,-1.012) 4(-1.756,-1.512) 5(-0.276,-1.512)
  rect 0.67x0.3 smd paste+0 mask+0: 6(-0.276,-1.012) 7(-0.276,-0.512)
  rect 0.67x0.3 on Mid1 paste+0 mask+0: 8(-0.276,-0.012)
  silkscreen extent -2.79,-2.04 -0.37,0.51
XRCGB40M000F1S2GR0 [mm]
  rect 0.75x0.7 smd: 1(-0.605,-0.51) 3(0.745,0.49)
  rect 0.75x0.7 on Mid1: 2(0.745,-0.51) 4(-0.605,0.49)
  silkscreen extent -1.53,-0.56 -1.43,-0.46

## Part data
C1: library part CMP-13271-002972-1, "Cap Ceramic 220nF 16V X7R ±10% SMD 0402 +125°C Paper T/R", Capacitance=220nF, Case Code (Imperial)=0402, Case Code (Metric)=1005, Dielectric=X7R, Max Operating Temperature=125°C, Min Operating Temperature=-55°C, Package Quantity=1, Tolerance=10%, Voltage Rating=16V, Case/Package=0402, Depth=0.5mm, Height=0.5mm, Length=1mm, Mount="Surface Mount", Packaging="Tape and Reel", Radiation Hardening=No, Thickness=0.022inch, Width=0.02inch
C2: library part CMP-1034-02089-3, "Chip Multilayer Ceramic Capacitors for General Purpose, 0402, 0.22uF, X7R, 15%, 10%, 16V", Capacitance=220nF, Case Code (Imperial)=0402, Case Code (Metric)=1005, Dielectric=X7R, Max Operating Temperature=125°C, Min Operating Temperature=-55°C, Package Quantity=1, Tolerance=10%, Voltage=16V, Case/Package=0402, Depth=0.5mm, Height=0.5mm, Lead Free="Lead Free", Length=1mm, Material=Ceramic, Mount="Surface Mount", Packaging="Tape and Reel", Radiation Hardening=No, REACH SVHC="No SVHC", Termination=SMD/SMT, Thickness=0.022inch, Voltage Rating=16V, Voltage Rating (DC)=16V, Width=0.02inch
C3 C11 C13 C15 C18: library part CMP-06035-017182-1, "Chip Multilayer Ceramic Capacitors for General Purpose, 0402, 2.2uF, X5R, 15%, 20%, 10V", Capacitance=2.2uF, Voltage=10V
C4 C12 C14 C16 C19: library part CMP-06035-036920-1, "Chip Multilayer Ceramic Capacitors for General Purpose, 0603, 10uF, X7R, 15%, 20%, 10V", Capacitance=10uF, Case/Package=0603, Voltage=10V
C5: library part CMP-2000-06006-2, "Multilayer Ceramic Capacitors 47nF ±10% 50V X7R SMD 0402", Capacitance=47nF, Case Code (Imperial)=0402, Case Code (Metric)=1005, Dielectric=X7R, Dielectric Material=Ceramic, Max Operating Temperature=125°C, Min Operating Temperature=-55°C, Package Quantity=1, Tolerance=10%, Voltage=50V, Case/Package=0402, Construction=Flat, Depth=0.5mm, Dissipation Factor=5%, Height=0.5mm, Lead Free="Lead Free", Length=1mm, Mount="Surface Mount", Number of Pins=2, Packaging="Tape and Reel", Radiation Hardening=No, REACH SVHC="No SVHC", Resistor Type=Ceramic, RoHS Compliant=Yes, Series=C, Termination=SMD/SMT, Thickness=0.022inch, Voltage Rating=50V, Voltage Rating (DC)=50V, Weight=2.3E-05oz, Width=0.02inch
C6 C7: library part CMP-2008-04587-2, "Chip Multilayer Ceramic Capacitors for General Purpose, 0402, 1.0uF, X7R, 15%, 10%, 6.3V", Capacitance=1uF, Case Code (Imperial)=0402, Case Code (Metric)=1005, Dielectric=X7R, Max Operating Temperature=125°C, Min Operating Temperature=-55°C, Package Quantity=10000, Tolerance=10%, Voltage Rating=6.3V, Case/Package=0402, Depth=0.5mm, Height=0.5mm, Lead Free="Lead Free", Length=1mm, Material=Ceramic, Mount="Surface Mount", Packaging="Tape and Reel", Termination=SMD/SMT, Thickness=0.022inch, Voltage Rating (DC)=6.3V, Weight=0.000212oz, Width=0.5mm
C8 C23: library part CMP-2008-03086-2, "CAP CER 0.1UF 10V X7R 0402", Capacitance="0.10 μF", Manufacturer=Kemet, Manufacturer Part Number=C0402C104K8RACTU, Package=C0402-BB, Temperature="-55°C to +125°C", Temperature Characteristic=X7R, Temperature Coefficient=15%, Temperature Range High=+125°C, Temperature Range Low=-55°C, Tolerance=0.1, Voltage Rating="10 V", Automotive=No, Category=Cap, ComponentLink2Description=Datasheet, ComponentLink2URL=https://content.kemet.com/datasheets/KEM_C1002_X7R_SMD.pdf, Device Class L1="Passive Components", Device Class L2=Capacitors, Device Class L3="Ceramic Capacitors", Digikey Description="CAP CER 0.1UF 10V X7R 0402", Height=0.55mm, Ipc Land Pattern Name=CAPC10050X50, Lead Free=Yes, Material=Ceramic, Mouser Description="Multilayer Ceramic Capacitors MLCC - SMD/SMT 10volts 0.1uF X7R 10%", Octopart=https://octopart.com/c0402c104k8ractu-kemet-106349, RoHS=TRUE
C9 C10: library part CMP-2008-03751-2, "Multi-Layer Ceramic Capacitor 4.7pF C0G  ±0.1pF 0402 Paper T/R", Capacitance=4.7pF, Case Code (Imperial)=0402, Case Code (Metric)=1005, Dielectric=C0G, Max Operating Temperature=125°C, Min Operating Temperature=-55°C, Package Quantity=10000, Voltage Rating=50V, Case/Package=0402, Depth=0.5mm, Height=0.5mm, Length=1mm, Mount="Surface Mount", Packaging="Tape and Reel", Radiation Hardening=No, Termination=SMD/SMT, Thickness=0.022inch, Voltage Rating (DC)=50V, Width=0.5mm
C17: library part CMP-06035-006740-1, "Multilayer Ceramic Capacitors MLCC - SMD/SMT 0805 4.7uF 10%, 16VDC,  X7R 15%", Capacitance=4.7uF, Case Code (Imperial)=0805, Case Code (Metric)=2012, Dielectric=X7R, Max Operating Temperature=125°C, Min Operating Temperature=-55°C, Package Quantity=3000, Ratings=AEC-Q200, Tolerance=10%, Voltage Rating=16V, Case/Package=0805, Features="Soft Termination", Height=1.25mm, Lead Free="Lead Free", Length=0.079inch, Mount="Surface Mount", Packaging="Tape and Reel", Termination=SMD/SMT, Thickness=0.057inch, Voltage Rating (DC)=16V, Weight=0.000335oz, Width=1.25mm
C20 C39: library part CMP-06035-011876-1, "Chip Multilayer Ceramic Capacitors for General Purpose, 0402, 1.0uF, X6S, 22%, 10%, 6.3V", Capacitance=1uF, Dielectric=X6S, Tolerance=10%, Voltage Rating (DC)=6.3V, Length=1mm, Thickness=500um, Width=500um
C21 C24 C26: library part CMP-06035-006530-1, "Multi-Layer Ceramic Capacitor 1uF 10V X6S ±10% 0402 Paper T/R", Capacitance=1uF, Case Code (Imperial)=0402, Case Code (Metric)=1005, Dielectric=X6S, Max Operating Temperature=105°C, Min Operating Temperature=-55°C, Ratings=AEC-Q200, Tolerance=10%, Voltage Rating=10V, Case/Package=0402, Length=0.039inch, Mount="Surface Mount", Packaging="Tape and Reel", Thickness=0.022inch, Voltage Rating (DC)=10V, Width=0.02inch
C22 C27: library part CMP-2000-07456-3, "Ceramic Capacitor for Automotive 100nF ±10% 50VDC X7R 0402 Paper T/R", Capacitance=100nF, Case Code (Imperial)=0402, Case Code (Metric)=1005, Dielectric=X7R, Max Operating Temperature=125°C, Min Operating Temperature=-55°C, Package Quantity=10000, Ratings=AEC-Q200, Tolerance=10%, Voltage Rating=50V, Case/Package=0402, Height=0.5mm, Lead Free="Lead Free", Length=0.039inch, Mount="Surface Mount", Packaging="Tape and Reel", REACH SVHC="No SVHC", Termination=SMD/SMT, Thickness=0.022inch, Voltage Rating (DC)=50V, Weight=0.000212oz, Width=0.5mm